# Altium PCB PCBnovi2.PcbDoc
Units mm, origin at the board's own origin, x right, y up, seen from the top; angles counter-clockwise.
Board outline 136.53 x 96.27 mm, 2 copper layers (Top Layer, Bottom Layer); 52 components, 42 nets, 180 pads, 53 vias.
Unrouted connection lines stored in the file: 1.
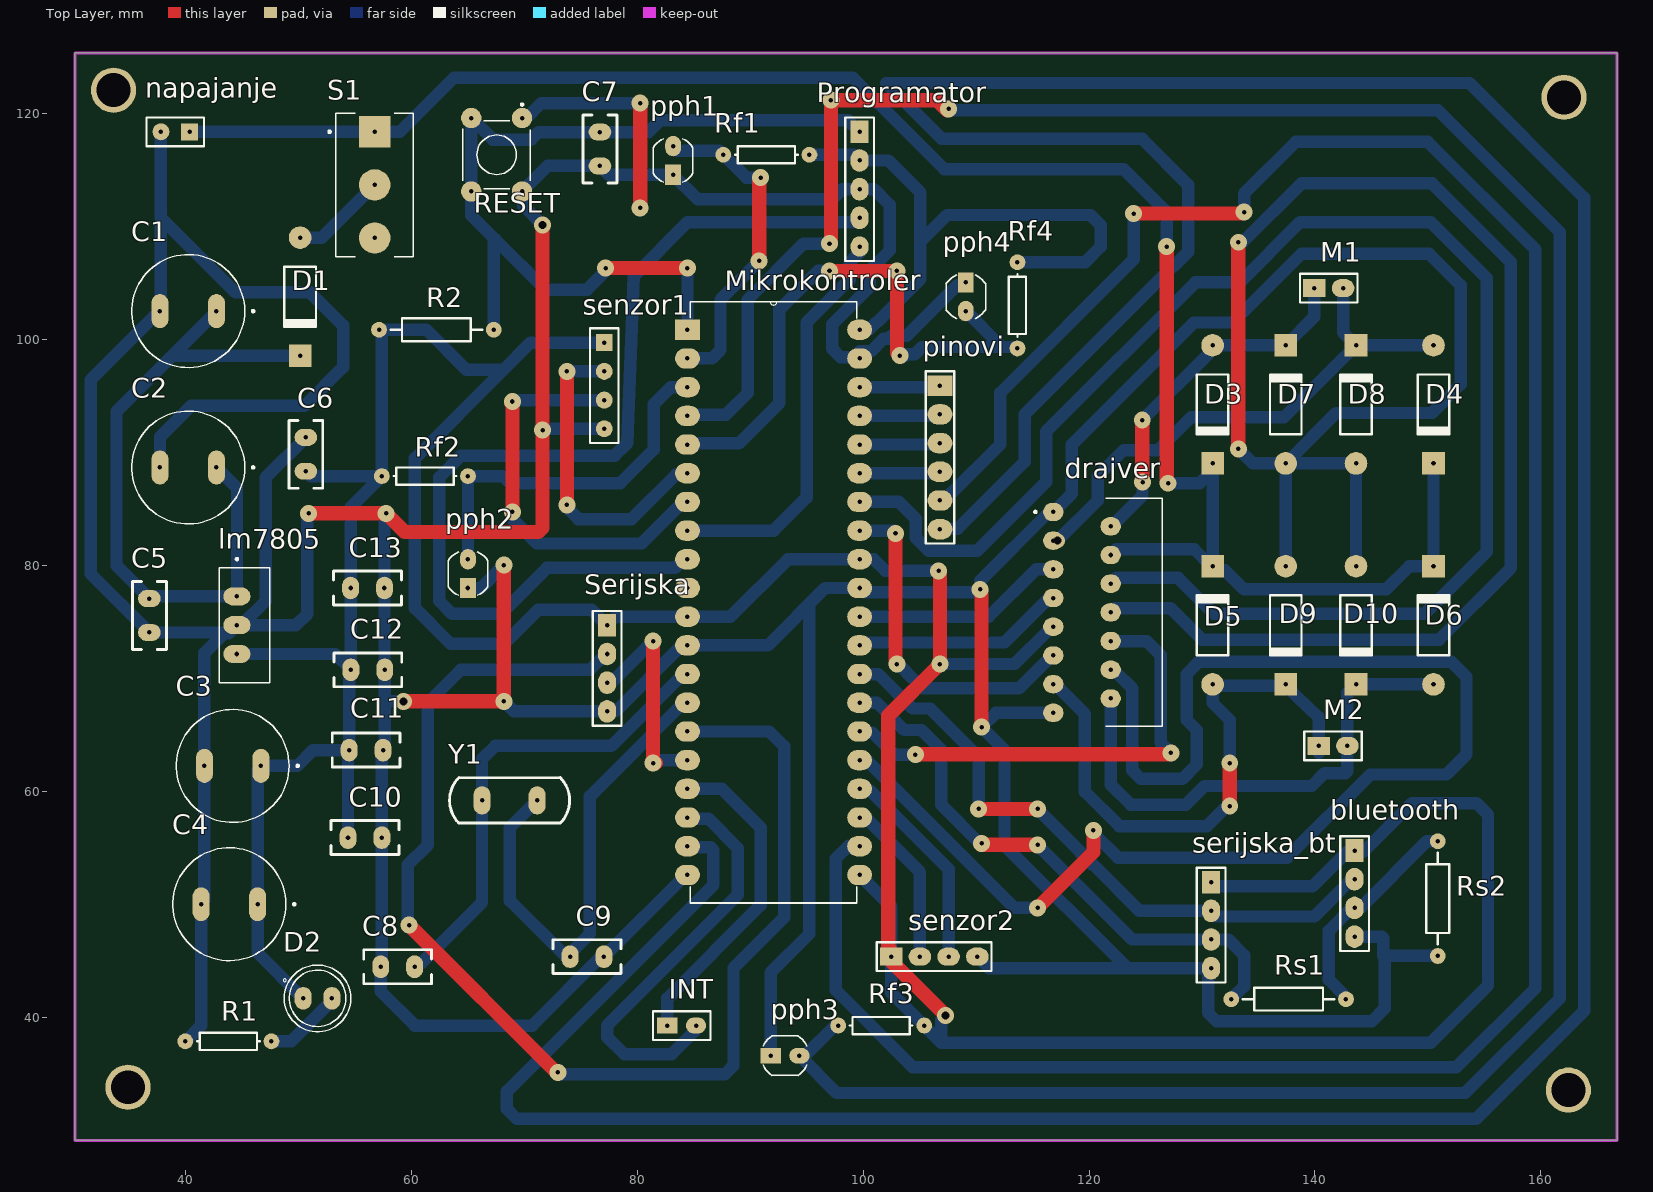
[diagram p0: Top Layer view]
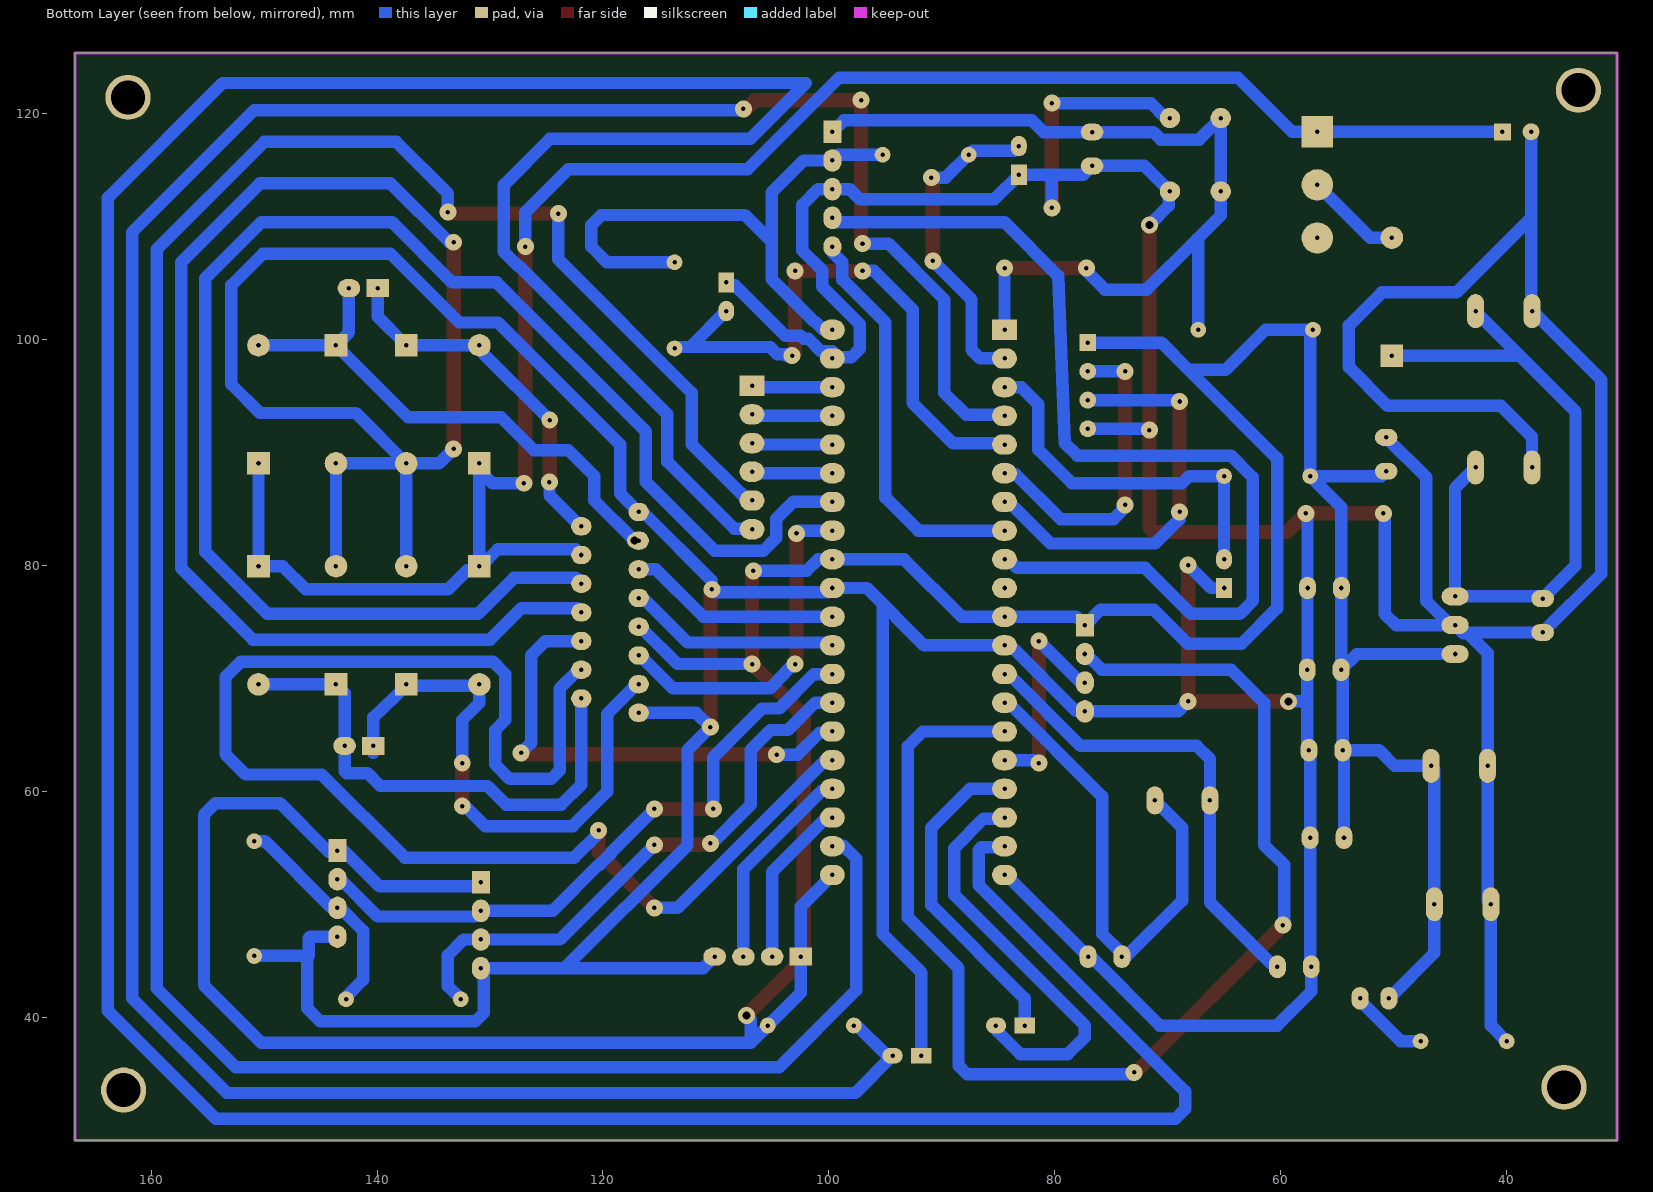
[diagram p1: Bottom Layer view, seen from below]

## Layer stack, top to bottom
Top Solder: solder mask 0.0102, Solder Resist, Dk 3.5
Top Layer: signal copper 0.0356
Dielectric 1: dielectric 0.32, FR-4, Dk 4.8
Bottom Layer: signal copper 0.0356
Bottom Solder: solder mask 0.0102, Solder Resist, Dk 3.5

## Board outline
30.226,29.083 30.226,125.349 166.751,125.349 166.751,29.083

## Design rules (kind name [scope] priority, off if disabled: settings)
Clearance POLIGON [InPolygon] p1: gap=0.381 ignorepadtopadclearanceinfootprint=FALSE
Clearance [All] p2: gap=0.381 ignorepadtopadclearanceinfootprint=FALSE
PolygonConnect [All] p1: connectstyle=Relief reliefconductorwidth=0.254 reliefentries=4 polygonreliefangle="90 Angle" airgapwidth=0.254
RoutingVias [All] p1: holewidth=0.711 width=1.27 viastyle="Through Hole" minholewidth=0.711 minwidth=1.27 maxholewidth=0.711 maxwidth=1.27
SolderMaskExpansion [All] p1: expansion=0.102
Width Width_1 [InNetClass('signali')] p1: maxlimit=1.27 minlimit=0.8 preferedwidth=1.1
Width [InNetClass('power')] p2: maxlimit=1.27 minlimit=0.8 preferedwidth=1
30 further rules are at their usual default settings.

## Classes and differential pairs
net class power: GND VCC
net class signali: ENA ENB NetC1_1 NetC3_1 NetD1_1 NetD2_2 Netpredaja_3 OSC1 OSC2 OUT1 OUT2 OUT3 OUT4 RA11 RB0 RB1 RB2 RB3 RB4 RB5 RB6 RB7 RB9 RB10 RB11 RB12 RC13 RC14 RD2 RD3 RD8 RD9 RESET RF0 RF1 RF2 RF3 RF4 RF5 RF6

## Components (designator, comment, footprint, x,y, rotation, side; value= is the part's Value field where it differs from the comment)
bluetooth "Header 4" HDR1X4#1 143.507,54.737 r270 top (schematic designator predaja)
C1 "Cap Pol1" 470uF 40.259,102.491 r180 top value=470uF
C2 "Cap Pol1" 470uF 40.259,88.646 r180 top value=470uF
C3 "Cap Pol1" 470uF 44.196,62.23 r180 top value=470uF
C4 "Cap Pol1" 470uF 43.902,49.987 r180 top value=470uF
C5 "Cap" Kondenzator 36.822,75.541 r270 top value=100nF
C6 "Cap" Kondenzator 50.673,89.813 r270 top value=100nF
C7 "Cap" Kondenzator 76.708,116.84 r270 top value=100nF
C8 "Cap" Kondenzator 58.801,44.45 r0 top value=33pF
C9 "Cap" Kondenzator 75.565,45.339 r0 top value=33pF
C10 "Cap" Kondenzator 55.904,55.88 r180 top value=100nF
C11 "Cap" Kondenzator 56.007,63.627 r180 top value=100nF
C12 "Cap" Kondenzator 56.158,70.739 r180 top value=100nF
C13 "Cap" Kondenzator 56.134,77.978 r0 top value=100nF
D1 "Diode 1N4007" DO-41 50.165,103.759 r270 top
D2 "LED0" LED 51.708,41.656 r0 top
D3 "Diode 1N4007" DO-41 130.937,94.234 r270 top
D4 "Diode 1N4007" DO-41 150.495,94.234 r270 top
D5 "Diode 1N4007" DO-41 130.937,74.676 r90 top
D6 "Diode 1N4007" DO-41 150.495,74.676 r90 top
D7 "Diode 1N4007" DO-41 137.414,94.234 r90 top
D8 "Diode 1N4007" DO-41 143.637,94.234 r90 top
D9 "Diode 1N4007" DO-41 137.414,74.676 r270 top
D10 "Diode 1N4007" DO-41 143.637,74.676 r270 top
drajver "L298N" L298N 116.84,84.709 r0 top (schematic designator serijska)
INT "Header 2" HDR1X2#1 82.677,39.243 r0 top
lm7805 "LM7805CT/NOPB" L7805 45.24,74.686 r270 top
M1 "Header 2" HDR1X2#2 139.954,104.521 r0 top
M2 "Header 2" HDR1X2#2 140.335,64.008 r0 top
Mikrokontroler "DSPIC30F4013-20E/P" DIP254P1524X635-40 99.695,52.578 r0 top (schematic designator OLJA)
napajanje "Header 2" HDR1X2#3 40.386,118.364 r180 top
pinovi "Header 6" HDR1X6 106.807,95.885 r270 top
pph1 "PDV-P9003-1" XDCR_PDV-P9003-1 83.185,115.824 r90 top
pph2 "PDV-P9003-1" XDCR_PDV-P9003-1 65.024,79.248 r90 top
pph3 "PDV-P9003-1" XDCR_PDV-P9003-1 93.091,36.576 r0 top
pph4 "PDV-P9003-1" XDCR_PDV-P9003-1 109.093,103.759 r270 top
Programator "Header 5" HDR1X5 99.695,118.364 r270 top
R1 "Res1" AXIAL-0.3 43.815,37.846 r0 top value=1k
R2 "Res2" AXIAL-0.4 62.23,100.838 r180 top value=10K
RESET "SW-PB" "Taster 6 mm" 67.564,116.332 r270 top
Rf1 "Res1" AXIAL-0.3 91.44,116.332 r0 top value=10K
Rf2 "Res1" AXIAL-0.3 61.214,87.884 r180 top value=10K
Rf3 "Res1" AXIAL-0.3 101.6,39.243 r0 top value=10K
Rf4 "Res1" AXIAL-0.3 113.665,102.997 r90 top value=10K
Rs1 "Res2" AXIAL-0.4 137.668,41.583 r180 top value=4K7
Rs2 "Res2" AXIAL-0.4 150.879,50.486 r270 top value=10K
S1 "SW-SPST" KIPP 56.769,113.665 r0 top
senzor1 "H" HDR1X4#2 77.089,99.695 r270 top
senzor2 "Header 4" HDR1X4#1 102.489,45.339 r0 top
Serijska "Header 4" HDR1X4#1 77.343,74.676 r270 top (schematic designator drajver)
serijska_bt "Header 4" HDR1X4#1 130.81,51.943 r270 top (schematic designator Prijem)
Y1 "XTAL" Oscilator 68.707,59.182 r0 top

## Footprints (in the part's own frame and the unit in brackets; to place one, negate y for a bottom-side part, rotate by r counter-clockwise, add the part's x,y. Pads: shape width x height; smd on the part's side, far side on the other; paste and mask are expansions set on the pad)
470uF [mm]
  oval 1.5x3 hole 0.4: 1(-2.5,0) 2(2.5,0)
  silkscreen extent -5.85,-5 5,5
AXIAL-0.3 [mm] "Axial Device, Thru-Hole; 2 Leads; 0.3 in Pin Spacing"
  round 1.4 hole 0.4: 1(-3.81,0) 2(3.81,0)
  silkscreen extent -2.77,-0.76 2.77,0.76
AXIAL-0.4 [mm] "Axial Device, Thru-Hole; 2 Leads; 0.4 in Pin Spacing"
  round 1.4 hole 0.4: 1(-5.08,0) 2(5.08,0)
  silkscreen extent -4.06,-1.02 4.06,1.02
DIP254P1524X635-40 [mm]
  rect 2.2x1.8 hole 0.4: 1(-15.24,48.26)
  oval 2.2x1.8 hole 0.4: 2(-15.24,45.72) 3(-15.24,43.18) 4(-15.24,40.64) 5(-15.24,38.1) 6(-15.24,35.56) 7(-15.24,33.02) 8(-15.24,30.48) 9(-15.24,27.94) 10(-15.24,25.4) 11(-15.24,22.86) 12(-15.24,20.32) 13(-15.24,17.78) 14(-15.24,15.24) 15(-15.24,12.7) 16(-15.24,10.16) 17(-15.24,7.62) 18(-15.24,5.08) 19(-15.24,2.54) 20(-15.24,0) 21(0,0) 22(0,2.54) 23(0,5.08) 24(0,7.62) 25(0,10.16) 26(0,12.7) 27(0,15.24) 28(0,17.78) 29(0,20.32) 30(0,22.86) 31(0,25.4) 32(0,27.94) 33(0,30.48) 34(0,33.02) 35(0,35.56) 36(0,38.1) 37(0,40.64) 38(0,43.18) 39(0,45.72) 40(0,48.26)
  silkscreen extent -14.99,-2.49 -0.25,50.75
DO-41 [mm] "Diode, Axial; Body 5.2 x 2.7 mm (LxDia. max), Lead Dia. 0.86 mm (max)"
  round 2 hole 0.4: 1(-5.23,0)
  rect 2x2 hole 0.4: 2(5.23,0)
  silkscreen extent -2.65,-1.4 2.75,1.4
HDR1X2#1 [mm] "Connector; Header; 2 Position"
  rect 1.8x1.4 hole 0.4: 1(0,0)
  oval 1.8x1.4 hole 0.4: 2(2.54,0)
  silkscreen extent -1.27,-1.27 3.81,1.27
HDR1X2#2 [mm] "Connector; Header; 2 Position"
  rect 2x1.6 hole 0.4: 1(0,0)
  oval 2x1.6 hole 0.4: 2(2.54,0)
  silkscreen extent -1.27,-1.27 3.81,1.27
HDR1X2#3 [mm] "Connector; Header; 2 Position"
  rect 1.5x1.5 hole 0.4: 1(0,0)
  round 1.5 hole 0.4: 2(2.54,0)
  silkscreen extent -1.27,-1.27 3.81,1.27
HDR1X4#1 [mm] "Connector; Header; 4 Position"
  rect 2x1.6 hole 0.4: 1(0,0)
  oval 2x1.6 hole 0.4: 2(2.54,0) 3(5.08,0) 4(7.62,0)
  silkscreen extent -1.27,-1.27 8.89,1.27
HDR1X4#2 [mm] "Connector; Header; 4 Position"
  rect 1.5x1.5 hole 0.4: 1(0,0)
  round 1.5 hole 0.4: 2(2.54,0) 3(5.08,0) 4(7.62,0)
  silkscreen extent -1.27,-1.27 8.89,1.27
HDR1X5 [mm] "Connector; Header; 5 Position"
  rect 2x1.6 hole 0.4: 1(0,0)
  oval 2x1.6 hole 0.4: 2(2.54,0) 3(5.08,0) 4(7.62,0)
  oval 1.8x1.6 hole 0.4: 5(10.16,0)
  silkscreen extent -1.27,-1.27 11.43,1.27
HDR1X6 [mm] "Connector; Header; 6 Position"
  rect 1.8x2.2 hole 0.4: 1(0,0)
  oval 1.8x2.2 hole 0.4: 2(2.54,0) 3(5.08,0) 4(7.62,0) 5(10.16,0) 6(12.7,0)
  silkscreen extent -1.27,-1.27 13.97,1.27
KIPP [mm]
  rect 2.775x2.775 hole 0.4: 1(0,4.7)
  round 2.775 hole 0.4: 2(0,0) 3(0,-4.7)
  silkscreen extent -4.1,-6.35 3.43,6.35
Kondenzator [mm]
  oval 1.5x2 hole 0.4: 1(-1.5,0) 2(1.5,0)
  silkscreen extent -3,-1.5 3,1.5
L298N [mm]
  oval 1.8x1.62 hole 0.4: 1(0,0) 2(5.08,-1.27) 3(0,-2.54) 4(5.08,-3.81) 5(0,-5.08) 6(5.08,-6.35) 7(0,-7.62) 8(5.08,-8.89) 9(0,-10.16) 10(5.08,-11.43) 11(0,-12.7) 12(5.08,-13.97) 13(0,-15.24) 14(5.08,-16.51) 15(0,-17.78)
  silkscreen extent -1.69,-18.99 9.63,1.21
L7805 [mm]
  oval 1.6x2.4 hole 0.4: 1(-2.55,-0.663) 2(0,-0.663) 3(2.55,-0.663)
  silkscreen extent -5.95,-2.25 5.1,2.25
LED [mm]
  oval 1.508x2 hole 0.4: 1(-1.27,0) 2(1.27,0)
  silkscreen extent -3.03,-2.95 2.95,2.95
Oscilator [mm]
  oval 1.5x2.5 hole 0.4: 1(-2.44,0) 2(2.44,0)
  silkscreen extent -5.31,-2.03 5.31,2.03
"Taster 6 mm" [mm]
  round 1.8 hole 0.4: 1(-3.25,2.25) 1(3.25,2.25) 2(-3.25,-2.25) 2(3.25,-2.25)
  silkscreen extent -4.54,-3 3,3
XDCR_PDV-P9003-1 [mm]
  rect 1.8x1.4 hole 0.4: 1(-1.27,0)
  oval 1.8x1.4 hole 0.4: 2(1.27,0)
  silkscreen extent -1.93,-1.76 1.93,1.76

## Part data
bluetooth senzor2 Serijska serijska_bt: "Header, 4-Pin", LatestRevisionDate=17-Jul-2002, LatestRevisionNote="Re-released for DXP Platform.", Publisher="Altium Limited"
C1 C2 C3 C4: "Polarized Capacitor (Radial)", LatestRevisionDate=17-Jul-2002, LatestRevisionNote="Re-released for DXP Platform.", PackageDescription="Polarized Capacitor (Radial); 2 Leads", PackageReference=RB7.6-15, Published=8-Jun-2000, Publisher="Altium Limited"
C5 C6 C7 C8 C9 C10 C11 C12 C13: "Capacitor", LatestRevisionDate=17-Jul-2002, LatestRevisionNote="Re-released for DXP Platform.", PackageDescription="Radial Cap, Thru-Hole; 2 Leads; 0.3 in Pin Spacing", PackageReference=RAD-0.3, Published=8-Jun-2000, Publisher="Altium Limited"
D1 D3 D4 D5 D6 D7 D8 D9 D10: "1 Amp General Purpose Rectifier", Code_JEDEC=DO-204-AL, ComponentLink1Description="Manufacturer Link", ComponentLink1URL=http://www.fairchildsemi.com/, ComponentLink2Description=Datasheet, ComponentLink2URL=http://www.fairchildsemi.com/ds/1N%2F1N4001.pdf, DatasheetVersion=1998, LatestRevisionDate=17-Jul-2002, LatestRevisionNote="Re-released for DXP Platform.", PackageDescription="Diode, Axial; Body 5.2 x 2.7 mm (LxDia. max), Lead Dia. 0.86 mm (max)", PackageReference=DO-41, PackageVersion=Aug-1999, Published=8-Jun-2000, Publisher="Altium Limited"
D2: "Typical INFRARED GaAs LED", LatestRevisionDate=08-Jul-2005, LatestRevisionNote="Mech Layer 1 removed.", PackageDescription="LED; 2 Leads", PackageReference=LED-0, Published=8-Jun-2000, Publisher="Altium Limited"
drajver: "Dual Full Bridge Motor Driver 15-Pin(15+Tab) MULTIWATT V Tube", Package=None, Availability=Unavailable, MP=L298N, Price=None
INT M1 M2 napajanje: "Header, 2-Pin", LatestRevisionDate=17-Jul-2002, LatestRevisionNote="Re-released for DXP Platform.", Publisher="Altium Limited"
lm7805: "Linear Voltage Regulator IC Positive Fixed 1 Output 1.5A TO-220-3", Package="TO-220-3 ON Semiconductor", Availability="In Stock", Check_prices=https://www.snapeda.com/parts/LM7805CT/Onsemi/view-part/?ref=eda, MF="ON Semiconductor", MP=LM7805CT, Price=None, Purchase-URL=https://pricing.snapeda.com/search/part/LM7805CT/?ref=eda, SnapEDA_Link=https://www.snapeda.com/parts/LM7805CT/Onsemi/view-part/?ref=snap
Mikrokontroler: "dsPIC dsPIC™ 30F Microcontroller IC 16-Bit 20 MIPS 48KB _16K x 24_ FLASH 40-PDIP", Package="DIP-40 Microchip", Digi-Key_Part_Number=DSPIC30F4013-20EP-ND, Digi-Key_Purchase_URL=https://www.digikey.rs/product-detail/en/microchip-technology/DSPIC30F4013-20E-P/DSPIC30F4013-20EP-ND/739428?utm_source=snapeda&utm_medium=aggregator&utm_campaign=symbol, MF=Microchip, MP=DSPIC30F4013-20E/P, SnapEDA_Link=https://www.snapeda.com/parts/DSPIC30F4013-20E/P/Microchip/view-part/143007/?ref=snap
pinovi: "Header, 6-Pin", LatestRevisionDate=17-Jul-2002, LatestRevisionNote="Re-released for DXP Platform.", Publisher="Altium Limited"
pph1 pph2 pph3 pph4: "CdS Cells 520nm 23 ~ 33kOhms @ 10 lux", Package="Radial Advanced Photonix", Availability=Unavailable, MF="Advanced Photonix", MP=PDV-P9003-1, Price=None, SnapEDA_Link=https://www.snapeda.com/parts/PDV-P9003-1/Advanced%20Photonix/view-part/58967/?ref=snap
Programator: "Header, 5-Pin", LatestRevisionDate=17-Jul-2002, LatestRevisionNote="Re-released for DXP Platform.", Publisher="Altium Limited"
R1 R2 Rf1 Rf2 Rf3 Rf4 Rs1 Rs2: "Resistor", LatestRevisionDate=17-Jul-2002, LatestRevisionNote="Re-released for DXP Platform.", Published=8-Jun-2000, Publisher="Altium Limited"
  R1 Rf1 Rf2 Rf3 Rf4: PackageDescription="Axial Device, Thru-Hole; 2 Leads; 0.3 in Pin Spacing", PackageReference=AXIAL-0.3
  R2 Rs1 Rs2: PackageDescription="Axial Device, Thru-Hole; 2 Leads; 0.4 in Pin Spacing", PackageReference=AXIAL-0.4
RESET: "Switch", LatestRevisionDate=17-Jul-2002, LatestRevisionNote="Re-released for DXP Platform.", PackageDescription="Switch; 2 Leads", PackageReference=SPST-2, Published=24-Mar-1999, Publisher="Altium Limited"
S1: "Single-Pole, Single-Throw Switch", LatestRevisionDate=17-Jul-2002, LatestRevisionNote="Re-released for DXP Platform.", PackageDescription="Switch; 2 Leads", PackageReference=SPST-2, Published=24-Mar-1999, Publisher="Altium Limited"
senzor1: library part "Header 4", "Header, 4-Pin", LatestRevisionDate=17-Jul-2002, LatestRevisionNote="Re-released for DXP Platform.", Publisher="Altium Limited"
Y1: "Crystal Oscillator", LatestRevisionDate=17-Jul-2002, LatestRevisionNote="Re-released for DXP Platform.", PackageDescription="Crystal, Thru-Hole; 2 Leads; Body 3.1 x 8.2 mm (Dia.xH)", PackageReference=R38, Published=8-Jun-2000, Publisher="Altium Limited"

## Free pads (board coordinates)
  round 4 hole 3: ""(33.655,122.047) ""(34.925,33.782) ""(162.052,121.412) ""(162.433,33.528)

## Via types
v1: diameter 1.5, hole 0.4, Top Layer to Bottom Layer, 49 vias
v2: diameter 1.5, hole 0.711, Top Layer to Bottom Layer, 3 vias
v3: diameter 1.27, hole 0.711, Top Layer to Bottom Layer, 1 vias

## Nets (pads, with @x,y where several pads share a name; then routed paths per layer and width w, separated by ;. In a path a pad name is that pad's centre, name@x,y a point inside that pad or via, vN(x,y) a via of type N, cw(c..) or ccw(c..) an arc to the next point about the centre after c; other vN are vias at no path point)
ENA: drajver.6 Mikrokontroler.34 | length 136.3
  Bottom Layer w1.1: Mikrokontroler.34 103.173,85.598 104.648,84.123 104.648,82.434 105.813,81.269 110.098,81.269 116.205,87.376 116.205,91.821 129.413,105.029 133.35,105.029 138.684,110.363 150.241,110.363 155.194,105.41 155.194,81.168 149.718,75.692 131.064,75.692 127.889,78.867 122.428,78.867 drajver.6
ENB: drajver.11 Mikrokontroler.33 | length 30.9
  Top Layer w1.27: v1(102.87,82.804) 102.87,71.374 v1(102.997,71.247)
  Bottom Layer w1.1: Mikrokontroler.33 102.743,83.058 102.87,82.931 v1(102.87,82.804) ; v1(102.997,71.247) 103.124,71.247 103.886,70.485 103.886,70.436 105.234,69.088 113.787,69.088 116.708,72.009 drajver.11
GND: bluetooth.4 C1.2 C2.2 C3.2 C4.2 C5.2 C6.1 C7.2 C8.1 C9.2 C10.1 C11.1 C12.1 C13.2 D7.1 D8.1 D9.1 D10.1 drajver.1 drajver.8 drajver.15 lm7805.2 Mikrokontroler.12 Mikrokontroler.20 Mikrokontroler.31 Mikrokontroler.39 napajanje.2 pph1.1 pph2.1 pph3.1 pph4.1 Programator.3 R1.1 RESET.1 Rs2.2 senzor1.4 senzor2.4 Serijska.4 serijska_bt.4 | length 842.1
  Top Layer w1.27: v1(50.927,84.582) v1(57.785,84.582) 59.436,82.931 71.247,82.931 71.628,83.312 v1(71.628,91.948) v2(71.628,110.109) ; v2(59.309,67.945) v1(68.199,67.945) v1(68.199,80.01) ; v1(80.264,111.633) v1(80.264,120.904) ; v1(110.363,77.851) 110.49,77.724 v1(110.49,65.659) ; v1(133.223,90.297) v1(133.223,108.585)
  Bottom Layer w1.1: C2.2 37.759,91.353 40.513,94.107 50.546,94.107 53.975,97.536 53.975,101.219 51.054,104.14 44.45,104.14 37.846,110.744 ; napajanje.2@37.846,117.983 37.846,110.744 ; R1.1 41.402,39.243 C4.2 41.696,50.281 C3.2 41.696,72.223 43.425,73.952 43.843,73.952 lm7805.2@43.932,74.041 ; C6.1 47.117,87.757 47.117,76.808 lm7805.2@44.995,74.686 ; v1(50.927,84.582) 50.8,84.455 50.8,75.692 49.794,74.686 lm7805.2@44.995,74.686 ; v1(57.785,84.582) 57.634,84.431 C13.2 57.634,70.763 C12.1 57.658,67.945 ; v2(59.309,67.945) 57.658,67.945 ; pph2.1 66.167,77.978 v1(68.199,80.01) ; v1(68.199,67.945) 69.088,67.056 Serijska.4 77.387,67.1 78.149,67.1 83.846,72.797 84.354,72.797 Mikrokontroler.12 91.567,72.898 96.647,77.978 Mikrokontroler.31 100.076,77.597 110.109,77.597 v1(110.363,77.851) 110.363,78.613 116.392,84.642 116.773,84.642 drajver.1 118.491,86.36 118.491,90.678 129.293,101.48 132.722,101.48 138.811,107.569 150.114,107.569 152.908,104.775 152.908,96.012 150.368,93.472 141.882,93.472 D7.1 ; RESET.1@69.814,119.582 70.189,119.582 71.511,120.904 v1(80.264,120.904) ; v1(71.628,91.948) 71.755,92.075 senzor1.4 ; v2(71.628,110.109) 69.915,111.822 69.915,112.981 69.814,113.082 72.072,115.34 C7.2 77.494,114.554 80.137,114.554 ; v1(80.264,111.633) 80.264,114.427 80.137,114.554 ; Mikrokontroler.20 84.304,52.578 C9.2 76.812,45.339 70.716,39.243 60.325,39.243 57.301,42.267 C8.1 57.404,44.553 C10.1 57.404,63.524 C11.1 57.507,63.939 57.658,64.09 57.658,67.945 ; pph3.1 91.821,43.942 95.25,47.371 95.25,76.519 ; Programator.3 98.171,113.284 97.282,112.395 85.344,112.395 pph1.1 80.137,114.554 ; Programator.3@100.203,113.284 100.965,113.284 102.362,111.887 102.362,107.865 100.584,106.087 100.584,104.637 97.282,101.335 97.282,99.143 98.026,98.399 99.594,98.399 Mikrokontroler.39 99.695,98.922 100.689,98.922 101.811,100.044 102.246,100.044 102.52,100.318 103.874,100.318 108.331,104.775 pph4.1@108.585,104.775 ; senzor2.4 111.125,44.323 123.395,44.323 ; drajver.15 111.76,66.929 v1(110.49,65.659) 112.522,63.627 112.522,55.196 123.395,44.323 ; drajver.8 122.301,76.2 127.205,76.2 129.999,73.406 151.003,73.406 157.353,79.756 157.353,106.807 150.368,113.792 138.811,113.792 133.604,108.585 v1(133.223,108.585) ; v1(133.223,90.297) 134.516,89.004 D7.1 ; D9.1 D7.1 ; bluetooth.4 145.923,47.117 146.05,46.99 146.05,45.406 ; D10.1 D8.1 D7.1 ; Rs2.2 146.05,45.406 ; 37.846,110.744 37.846,102.578 C1.2 37.721,102.491 31.623,96.393 31.623,79.24 C5.2 lm7805.2@43.932,74.041 ; lm7805.2@43.932,74.041 lm7805.2 lm7805.2@44.995,74.686 ; 123.395,44.323 serijska_bt.4 130.81,44.261 130.556,44.007 130.556,40.368 131.3,39.624 145.034,39.624 146.177,40.767 146.177,45.279 146.05,45.406
NetC1_1: C1.1 C2.1 C5.1 D1.2 lm7805.1 | length 61.6
  Bottom Layer w1.1: C2.1 44.577,86.828 lm7805.1 37.018,77.236 C5.1 33.909,79.954 33.909,93.599 38.839,98.529 ; C1.1 42.759,102.449 38.839,98.529 ; D1.2 38.839,98.529
NetC3_1: bluetooth.1 C3.1 C4.1 C6.2 C10.2 C11.2 C12.2 C13.1 D2.1 drajver.9 lm7805.3 Mikrokontroler.11 Mikrokontroler.21 Mikrokontroler.32 Mikrokontroler.40 Programator.2 R2.2 Rf1.2 Rf2.2 Rf3.2 Rf4.2 senzor1.1 senzor2.1 Serijska.1 serijska_bt.1 | length 415.6
  Top Layer w1.27: senzor2.1@102.235,45.212 v2(107.315,40.132) ; senzor2.1 102.374,45.454 102.374,46.056 102.235,46.195 102.235,66.675 v1(106.807,71.247) 106.807,79.375 v1(106.68,79.502)
  Bottom Layer w1.1: lm7805.3 53.261,72.136 C12.2 ; D2.1 46.402,45.692 C4.1 46.402,61.936 C3.1 49.911,62.23 51.308,63.627 C11.2 ; C6.2 51.102,87.884 Rf2.2 ; C10.2 54.404,63.524 C11.2 ; senzor1.1 70.563,99.695 68.15,97.282 ; Rf1.2 99.187,116.332 Programator.2 ; Mikrokontroler.21 102.489,49.784 senzor2.1 102.489,42.164 Rf3.2 106.934,37.719 ; Mikrokontroler.40 100.51,100.838 101.198,101.525 101.271,101.525 105.078,105.332 105.078,108.634 ; Programator.2@100.203,115.824 102.235,115.824 105.078,112.981 105.078,108.634 ; v1(106.68,79.502) 101.981,79.502 100.965,80.518 Mikrokontroler.32 93.345,80.518 88.265,75.438 Mikrokontroler.11 78.105,75.438 Serijska.1 75.958,76.061 71.255,76.061 68.219,73.025 63.5,73.025 60.325,76.2 60.325,89.457 68.15,97.282 ; v1(106.807,71.247) 113.406,71.247 116.443,74.284 116.575,74.284 drajver.9 ; v2(107.315,40.132) 106.934,39.751 106.934,37.719 ; Rf4.2 119.652,106.807 121.031,108.186 121.031,110.109 120.142,110.998 107.442,110.998 105.078,108.634 ; serijska_bt.1 131.191,51.562 139.778,51.562 142.953,54.737 bluetooth.1 143.628,54.616 144.278,54.616 148.59,58.928 154.305,58.928 155.321,57.912 155.321,42.799 150.241,37.719 106.934,37.719 ; C11.2 54.507,70.588 C12.2 ; C12.2 54.658,77.954 C13.1 54.634,85.114 Rf2.2 ; Rf2.2 57.404,100.584 R2.2 61.341,100.838 64.897,97.282 68.15,97.282
NetD1_1: D1.1 S1.2 | length 8.5
  Bottom Layer w1.1: D1.1 52.093,108.989 S1.2
NetD2_2: D2.2 R1.2 | length 7.1
  Bottom Layer w1.1: R1.2 49.377,37.846 52.978,41.447 D2.2
Netpredaja_3: bluetooth.3 Rs1.1 Rs2.1 | length 19.4
  Bottom Layer w1.1: Rs1.1@142.748,41.783 141.224,43.307 141.224,47.625 143.256,49.657 bluetooth.3 144.018,49.657 149.927,55.566 Rs2.1
OSC1: C8.2 Mikrokontroler.13 Y1.1 | length 42.4
  Bottom Layer w1.1: C8.2 60.301,44.638 60.407,44.744 60.873,44.744 66.267,50.138 Y1.1 66.267,62.838 67.437,64.008 77.724,64.008 83.973,70.257 84.354,70.257 Mikrokontroler.13
OSC2: C9.1 Mikrokontroler.14 Y1.2 | length 44.3
  Bottom Layer w1.1: Y1.2 68.734,56.769 68.734,50.292 73.687,45.339 C9.1 74.065,45.617 75.819,47.371 75.819,59.525 84.112,67.818 Mikrokontroler.14
OUT1: D3.1 D7.2 drajver.2 M1.1 | length 32.4
  Top Layer w1.27: v1(124.714,92.837) 124.714,87.376 v1(124.738,87.352)
  Bottom Layer w1.1: drajver.2 122.034,83.553 122.124,83.553 124.738,86.167 v1(124.738,87.352) ; v1(124.714,92.837) 130.572,98.695 130.572,98.901 130.937,99.266 D3.1 D7.2 139.954,102.004 M1.1
OUT2: D4.1 D8.2 drajver.3 M1.2 | length 47.6
  Top Layer w1.1: drajver.3 v3(117.221,82.169)
  Bottom Layer w1.1: v3(117.221,82.169) 120.777,85.725 120.777,87.884 123.063,90.17 126.111,90.17 129.032,93.091 137.264,93.091 D8.2 ; M1.2 142.494,100.607 D8.2 ; D4.1 D8.2
OUT3: D5.1 D9.2 drajver.13 M2.1 | length 50.8
  Top Layer w1.27: v1(132.461,58.674) v1(132.461,62.484)
  Bottom Layer w1.1: drajver.13@116.708,69.469 drajver.13 116.972,69.469 119.634,66.807 119.634,59.944 122.682,56.896 130.429,56.896 132.207,58.674 v1(132.461,58.674) ; D5.1 D5.1@130.937,69.319 ; v1(132.461,62.484) 132.461,66.294 130.937,67.818 D5.1@130.937,69.319 ; M2.1@140.335,63.406 M2.1 140.335,66.525 137.414,69.319 D5.1@130.937,69.319
OUT4: D6.1 D10.2 drajver.14 M2.2 | length 45.4
  Bottom Layer w1.1: drajver.14 121.92,60.579 123.698,58.801 128.573,58.801 130.224,60.452 139.716,60.452 140.859,61.595 142.699,61.595 142.875,61.771 M2.2 142.875,68.684 D10.2 D6.1
RA11: INT.1 Mikrokontroler.17 | length 28.8
  Bottom Layer w1.1: INT.1 82.677,41.656 90.932,49.911 90.932,56.769 87.503,60.198 Mikrokontroler.17
RB0: Mikrokontroler.2 pph1.2 Rf1.1 | length 28.8
  Top Layer w1.27: v1(90.805,106.934) 90.805,114.173 v1(90.932,114.3)
  Bottom Layer w1.1: pph1.2@83.185,116.959 83.32,116.959 83.59,116.689 87.273,116.689 Rf1.1 89.662,114.3 v1(90.932,114.3) ; Mikrokontroler.2 86.614,98.298 87.376,99.06 87.376,103.505 v1(90.805,106.934)
RB1: Mikrokontroler.3 pph2.2 Rf2.1 | length 32.9
  Bottom Layer w1.1: pph2.2 Rf2.1 68.121,87.884 68.756,87.249 78.486,87.249 81.456,90.219 81.456,94.234 82.98,95.758 Mikrokontroler.3
RB2: Mikrokontroler.4 pph3.2 Rf3.1 | length 250.4
  Top Layer w1.27: v1(97.028,108.458) 97.155,108.585 v1(97.155,121.158) 106.553,121.158 107.442,120.269 v1(107.569,120.396)
  Bottom Layer w1.1: Mikrokontroler.4 84.556,93.319 87.858,93.319 89.789,95.25 89.789,103.505 94.742,108.458 v1(97.028,108.458) ; Rf3.1 97.536,39.243 94.869,36.576 pph3.2 97.663,33.274 153.289,33.274 161.671,41.656 161.671,109.474 150.876,120.269 107.696,120.269 v1(107.569,120.396)
RB3: Mikrokontroler.5 pph4.2 Rf4.1 | length 51.7
  Top Layer w1.27: v1(97.028,106.045) v1(102.997,106.045) 102.997,98.806 v1(103.251,98.552)
  Bottom Layer w1.1: Mikrokontroler.5 84.556,90.779 89.001,90.779 92.583,94.361 92.583,102.616 96.012,106.045 v1(97.028,106.045) ; v1@103.759,98.552 103.874,98.667 104.558,98.667 105.205,99.314 112.141,99.314 ; pph4.2 112.141,99.441 112.141,99.314 ; Rf4.1@113.411,99.314 112.141,99.314
RB4: Mikrokontroler.6 senzor1.2 | length 28.1
  Top Layer w1.27: v1(73.787,85.344) v1(73.787,97.155)
  Bottom Layer w1.1: v1(73.787,85.344) 73.787,85.09 74.803,84.074 79.502,84.074 83.465,88.037 84.354,88.037 Mikrokontroler.6 ; v1(73.787,97.155) senzor1.2
RB5: Mikrokontroler.7 senzor1.3 | length 36.6
  Top Layer w1.27: v1(68.961,84.709) 68.961,94.223 68.834,94.35 68.966,94.483 v1(68.961,94.488)
  Bottom Layer w1.1: v1(68.961,84.709) 68.961,84.074 71.12,81.915 80.391,81.915 83.809,85.333 83.847,85.333 84.112,85.598 Mikrokontroler.7 ; v1(68.961,94.488) 69.088,94.615 senzor1.3
RB6: Mikrokontroler.8 Programator.5 | length 35.9
  Bottom Layer w1.1: Mikrokontroler.8 92.075,83.058 94.996,85.979 94.996,101.473 98.806,105.283 98.806,106.807 99.695,107.696 Programator.5
RB7: Mikrokontroler.9 Programator.4 | length 90.2
  Bottom Layer w1.1: Mikrokontroler.9 84.112,80.518 83.35,79.756 72.009,79.756 67.945,75.692 63.627,75.692 62.484,76.835 62.484,87.771 64.41,89.697 78.013,89.697 79.13,90.814 79.704,105.612 84.455,110.363 99.314,110.363 Programator.4
RB9: Mikrokontroler.38 pinovi.1 | length 7.2
  Bottom Layer w1.1: Mikrokontroler.38 106.68,95.758 pinovi.1
RB10: Mikrokontroler.37 pinovi.2 | length 7.2
  Bottom Layer w1.1: Mikrokontroler.37 106.68,93.218 pinovi.2
RB11: Mikrokontroler.36 pinovi.3 | length 7.2
  Bottom Layer w1.1: Mikrokontroler.36 106.68,90.678 pinovi.3
RB12: Mikrokontroler.35 pinovi.4 | length 7.2
  Bottom Layer w1.1: Mikrokontroler.35 106.68,88.138 pinovi.4
RC13: Mikrokontroler.15 Serijska.2 | length 111.9
  Top Layer w1.27: v1(59.817,48.133) 72.859,35.091 v1(72.986,35.091)
  Bottom Layer w1.1: v1(59.817,48.133) 59.69,48.26 59.69,53.467 61.468,55.245 61.468,67.818 64.389,70.739 75.838,70.739 77.235,72.136 Serijska.2 ; v1(72.986,35.091) 73.152,34.925 87.757,34.925 88.527,35.695 88.527,44.331 93.005,48.809 93.005,63.967 91.694,65.278 Mikrokontroler.15
RC14: Mikrokontroler.16 Serijska.3 | length 19.4
  Top Layer w1.27: v1(81.407,73.279) 81.407,62.738 v1@81.661,62.484
  Bottom Layer w1.1: Serijska.3 77.724,69.596 v1(81.407,73.279) ; v1@81.661,62.484 81.915,62.738 Mikrokontroler.16
  other v1: 81.407,62.484
RD2: Mikrokontroler.22 pinovi.5 | length 222.2
  Top Layer w1.27: v1(123.952,111.125) 133.604,111.125 v1(133.731,111.252)
  Bottom Layer w1.1: Mikrokontroler.22@98.747,55.186 97.579,54.018 97.579,42.375 104.394,35.56 152.527,35.56 159.512,42.545 159.512,107.95 149.987,117.475 138.303,117.475 133.731,112.903 v1(133.731,111.252) ; pinovi.5 107.15,85.725 107.774,86.349 107.801,86.349 112.141,90.689 112.141,95.25 123.952,107.061 v1(123.952,111.125)
RD3: Mikrokontroler.19 pinovi.6 | length 341.6
  Bottom Layer w1.1: Mikrokontroler.19 84.556,55.017 86.505,55.017 86.741,54.781 86.741,51.689 68.471,33.419 68.471,31.859 69.342,30.988 154.276,30.988 163.83,40.542 163.83,112.522 153.67,122.682 102.03,122.682 106.983,117.729 124.714,117.729 128.778,113.665 128.778,107.732 127.569,106.523 127.478,106.523 114.3,93.345 114.3,89.154 108.382,83.236 106.858,83.236 pinovi.6
RD8: Mikrokontroler.23 senzor2.2 | length 14.8
  Bottom Layer w1.1: Mikrokontroler.23 99.796,57.557 100.304,57.557 105.029,52.832 senzor2.2
RD9: INT.2 Mikrokontroler.18 | length 36.9
  Bottom Layer w1.1: Mikrokontroler.18 84.556,57.557 86.3,57.557 88.9,54.957 88.9,50.8 77.343,39.243 77.343,38.227 78.867,36.703 83.054,36.703 85.09,38.739 85.09,39.116 INT.2 INT.2@85.217,39.181
RESET: C7.1 Mikrokontroler.1 Programator.1 R2.1 RESET.2 | length 81.4
  Top Layer w1.27: v1(77.216,106.299) v1(84.455,106.299)
  Bottom Layer w1.1: R2.1 67.31,108.712 67.437,108.839 ; v1(77.216,106.299) 77.343,106.172 75.565,104.394 71.882,104.394 67.437,108.839 ; Mikrokontroler.1 v1(84.455,106.299) ; Programator.1@99.671,118.34 Programator.1 98.679,119.38 82.042,119.38 81.002,118.34 C7.1 71.282,118.34 70.608,117.666 67.23,117.666 65.314,119.582 65.314,113.082 65.314,110.962 67.437,108.839
RF0: drajver.5 Mikrokontroler.30 | length 18.9
  Bottom Layer w1.1: Mikrokontroler.30 111.125,75.438 115.316,79.629 drajver.5
RF1: drajver.7 Mikrokontroler.29 | length 18.9
  Bottom Layer w1.1: Mikrokontroler.29 99.949,73.152 112.522,73.152 116.459,77.089 drajver.7
RF2: drajver.10 Mikrokontroler.26 | length 42.4
  Top Layer w1.27: v1(104.624,63.222) 104.648,63.246 127.127,63.246 v1(127.254,63.373)
  Bottom Layer w1.1: Mikrokontroler.26 99.796,65.177 100.812,65.177 102.767,63.222 v1(104.624,63.222) ; drajver.10 125.095,73.279 126.365,72.009 126.365,64.262 v1(127.254,63.373)
RF3: drajver.12 Mikrokontroler.25 | length 125.4
  Top Layer w1.27: v1(115.443,49.657) 120.396,54.61 v1(120.396,56.515)
  Bottom Layer w1.1: Mikrokontroler.25 99.796,62.637 100.431,62.637 113.411,49.657 v1(115.443,49.657) ; v1(120.396,56.515) 120.396,56.261 122.555,54.102 137.541,54.102 144.907,61.468 151.638,61.468 153.416,63.246 153.416,70.104 152.058,71.462 129.755,71.462 128.651,70.358 128.651,66.294 129.54,65.405 129.54,62.357 128.27,61.087 124.58,61.087 123.836,61.831 123.836,69.077 122.349,70.564 122.28,70.564 122.105,70.739 drajver.12
RF4: bluetooth.2 Mikrokontroler.28 serijska_bt.2 | length 56.8
  Top Layer w1.27: v1(110.236,58.42) v1(115.443,58.42)
  Bottom Layer w1.1: Mikrokontroler.28 101.346,70.358 104.394,67.31 105.934,67.31 110.236,63.008 v1(110.236,58.42) ; v1(115.443,58.42) 119.265,54.598 119.265,54.514 120.3,53.479 120.384,53.479 124.46,49.403 serijska_bt.2 131.318,48.895 139.954,48.895 143.256,52.197 bluetooth.2
RF5: Mikrokontroler.27 Rs1.2 serijska_bt.3 | length 50.7
  Top Layer w1.27: v1(110.49,55.372) 110.49,55.275 110.46,55.245 v1(115.443,55.245)
  Bottom Layer w1.1: Mikrokontroler.27 101.219,67.818 103.632,65.405 105.156,65.405 106.934,63.627 106.934,58.772 110.413,55.293 110.49,55.37 v1(110.49,55.372) ; v1(115.443,55.245) 123.825,46.863 serijska_bt.3 132.334,46.863 133.731,45.466 133.731,42.726 Rs1.2
RF6: Mikrokontroler.24 senzor2.3 | length 18.6
  Bottom Layer w1.1: Mikrokontroler.24 99.796,60.097 100.558,60.097 107.569,53.086 senzor2.3
VCC: D3.2 D4.2 D5.2 D6.2 drajver.4 napajanje.1 S1.1 | length 170.9
  Top Layer w1.27: v1(126.873,108.204) 126.873,87.376 v1(127,87.249)
  Bottom Layer w1.1: napajanje.1 S1.1 S1.1 59.007,118.365 63.791,123.149 99.101,123.149 107.188,115.062 123.063,115.062 126.873,111.252 v1(126.873,108.204) ; drajver.4 122.428,81.407 129.315,81.407 130.816,79.906 130.816,79.701 130.937,79.629 131.025,79.541 132.041,79.541 133.731,77.851 146.304,77.851 148.35,79.897 150.486,79.897 D6.2 D4.2 ; v1(127,87.249) 129.794,87.249 130.572,88.027 130.572,88.639 D3.2 ; D5.2 D3.2@130.937,88.027
pads on no net: Mikrokontroler.10 S1.3

## Keep-outs
Keep-Out Layer:
  the board outline again, w0.254